# Altium PCB SENSOR_SAW.PcbDoc
Units mil, origin at the board's own origin, x right, y up, seen from the top; angles counter-clockwise.
Board outline 1000 x 1125 mil, 2 copper layers (Top Layer, Bottom Layer); 24 components, 15 nets, 79 pads, 94 vias.
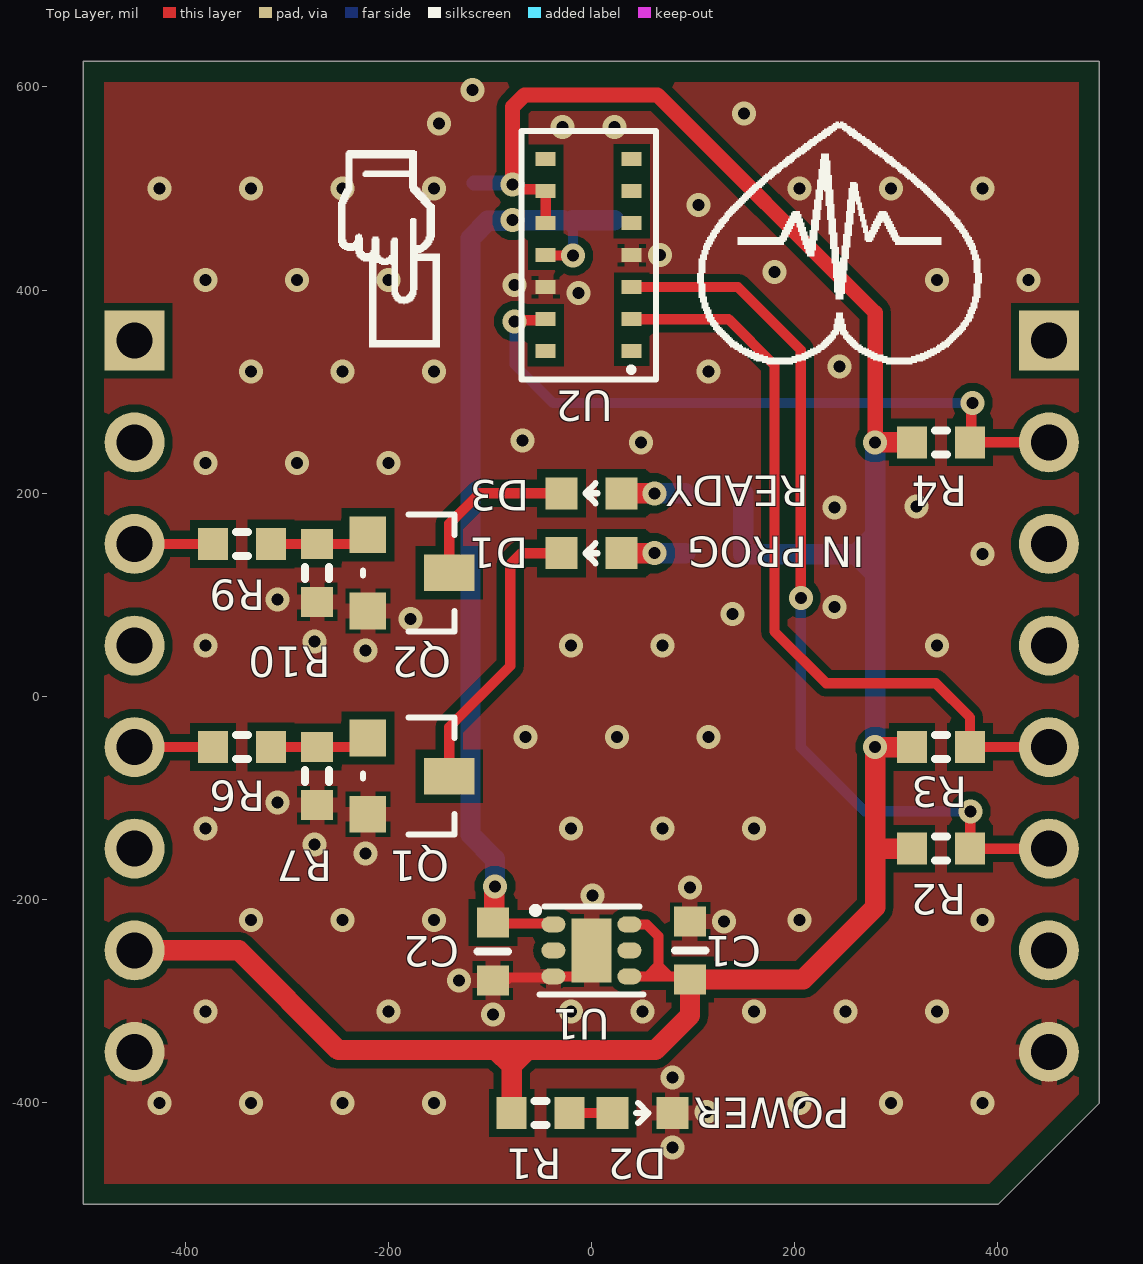
[diagram p0: Top Layer view]
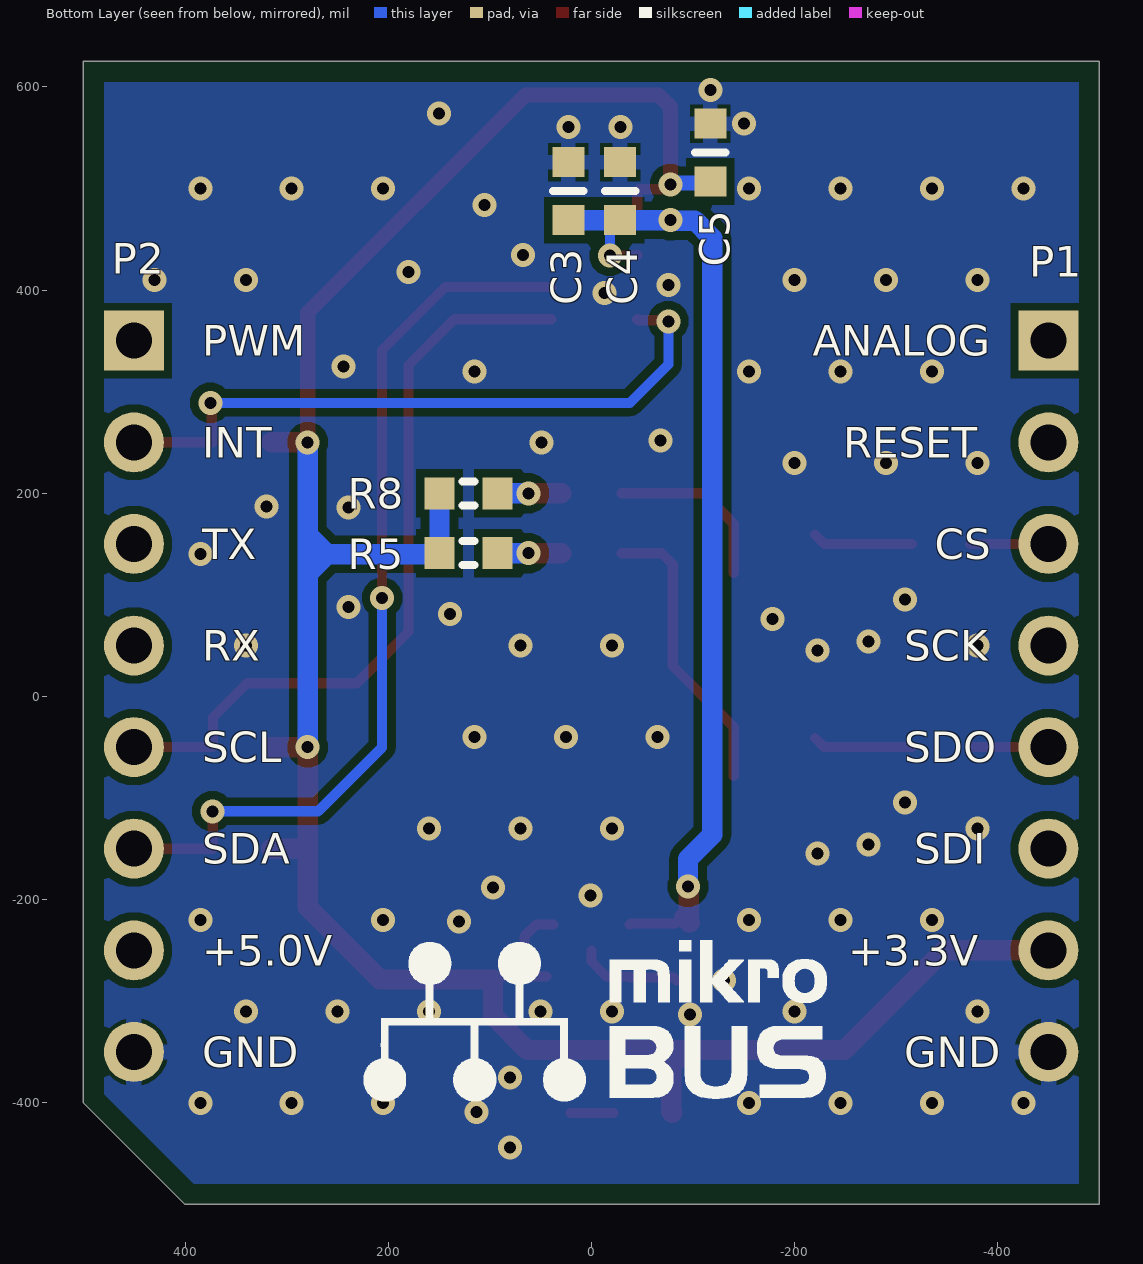
[diagram p1: Bottom Layer view, seen from below]
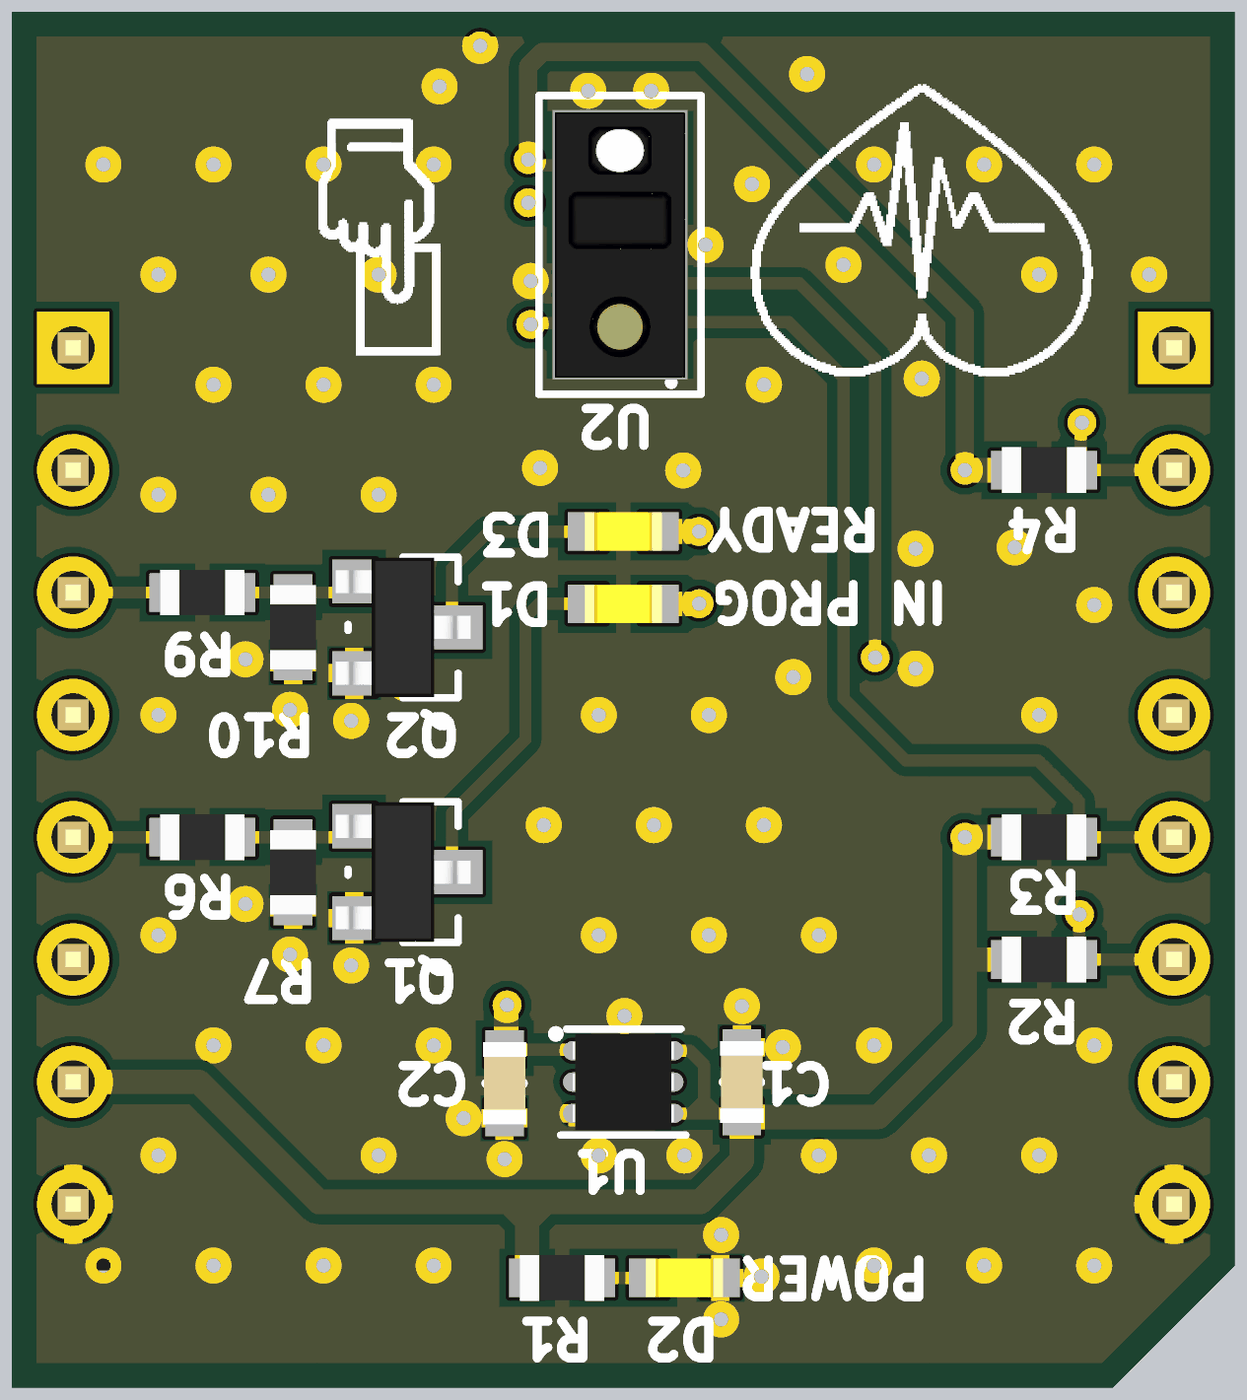
[diagram p2: 3D render of the assembled board from above, using the file's embedded part models]
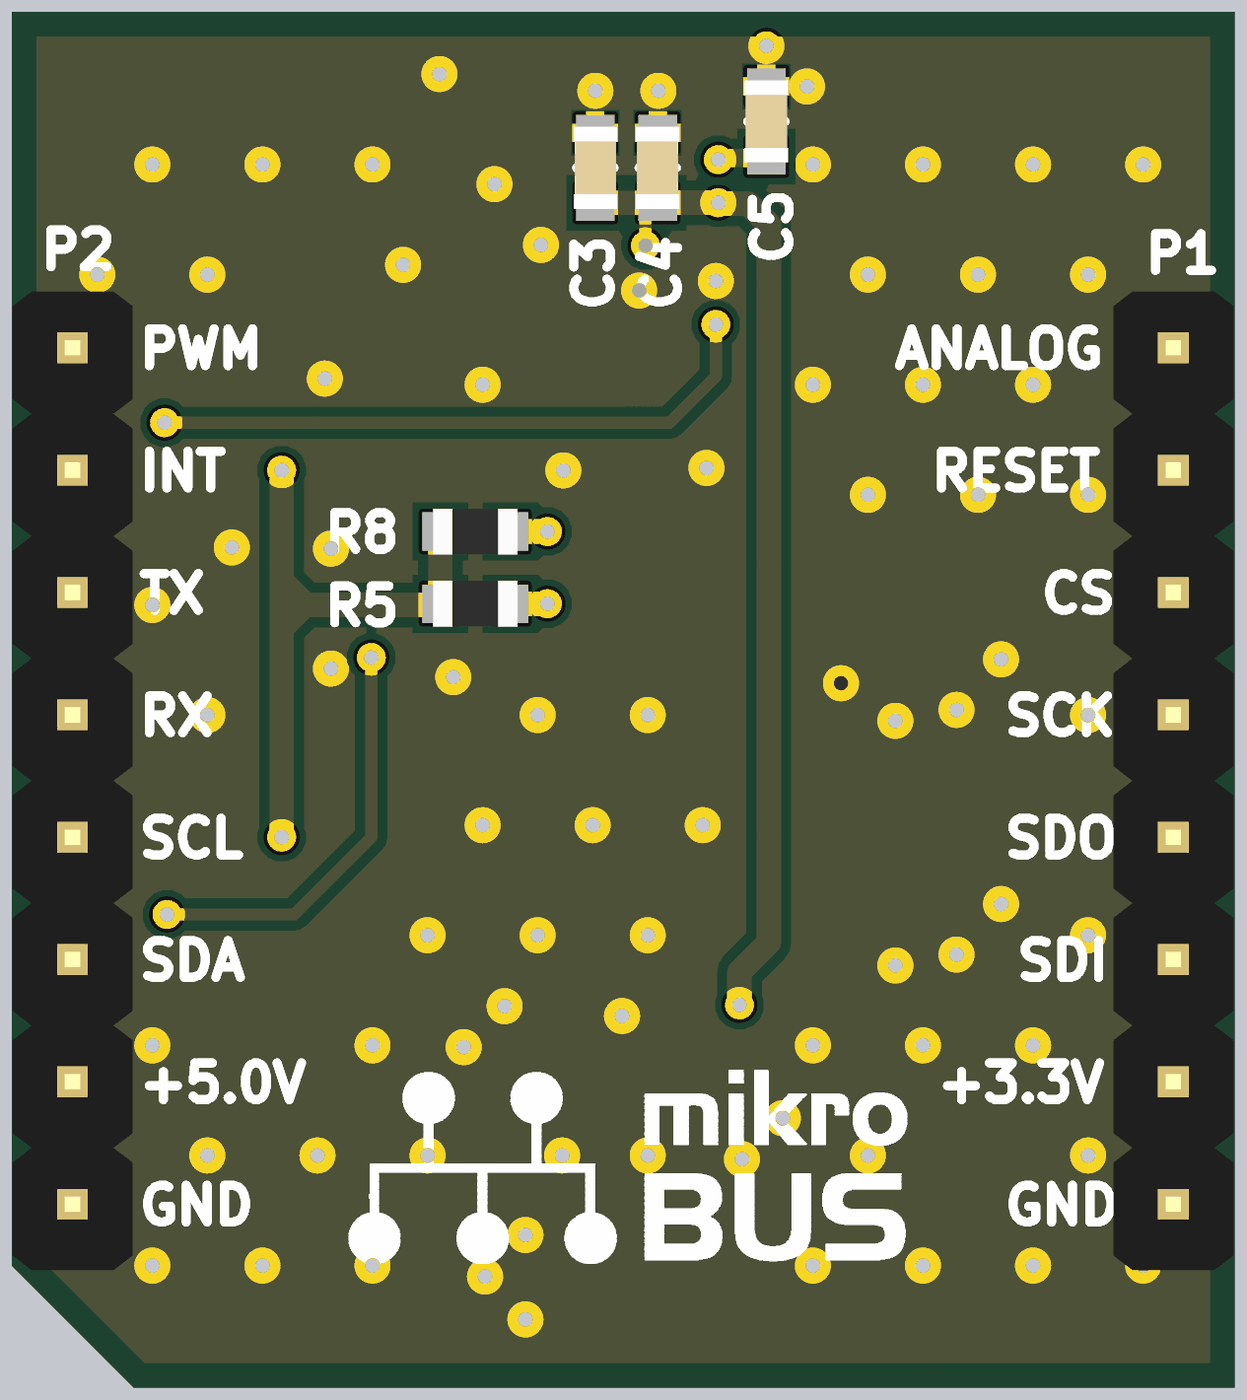
[diagram p3: 3D render of the assembled board from below, using the file's embedded part models]

## Layer stack, top to bottom
Top Solder: solder mask 0.4, Solder Resist, Dk 3.5
Top Layer: signal copper 1.4
Dielectric 1: dielectric 12.6, FR-4, Dk 4.8
Bottom Layer: signal copper 1.4
Bottom Solder: solder mask 0.4, Solder Resist, Dk 3.5

## Board outline
-500,-500 -500,625 500,625 500,-400 400,-500

## Design rules (kind name [scope] priority, off if disabled: settings)
BoardOutlineClearance [All] p1: gap=7.87 ignorepadtopadclearanceinfootprint=FALSE except(20: Poly-OutlineEdge)
Clearance [All] p1: gap=5 ignorepadtopadclearanceinfootprint=FALSE except(7.87: Track-SMDPad; 8: Arc-Poly Track-Poly SMDPad-Poly THPad-Poly Via-Poly Fill-Poly Poly-Poly Poly-Region Poly-Text Poly-Hole; 10: Track-Hole Via-Via; 12.99: Track-THPad; 21.26: THPad-THPad)
ComponentClearance [All] p1: gap=4 collisioncheckmode=3 verticalgap=4 showdistances=TRUE
DiffPairsRouting [All] p1: maxlimit=4 minlimit=4 mostfreqgap=4 toplayer_minwidth=4 toplayer_maxwidth=71497.94 toplayer_prefwidth=4 bottomlayer_minwidth=4 bottomlayer_maxwidth=71497.94 bottomlayer_prefwidth=4 maxuncoupledlength=500
Height [All] p1: minheight=0 maxheight=71497.94 prefheight=500
HoleSize [All] p1: absolutevalues=TRUE maxlimit=248.03 minlimit=7.87 maxpercent=80.000 minpercent=20.000
HoleToHoleClearance [All] p1: gap=10 allowstackedmicrovias=FALSE
MinimumAnnularRing [All] p1: minimumring=5.12
MinimumSolderMaskSliver [All] p1: minsoldermaskwidth=0
PlaneClearance [All] p1: clearance=6
PlaneConnect [All] p1: pad.planeconnectstyle=Relief pad.reliefexpansion=11.81 pad.reliefentries=4 pad.reliefconductorwidth=15 pad.reliefairgap=4 via.planeconnectstyle=Direct via.reliefexpansion=11.81 via.reliefentries=4 via.reliefconductorwidth=5 via.reliefairgap=5
PolygonConnect [All] p1: thpad.connectstyle=Relief thpad.reliefconductorwidth=15 thpad.reliefentries=4 thpad.polygonreliefangle="90 Angle" thpad.airgapwidth=4 smdpad.connectstyle=Relief smdpad.reliefconductorwidth=15 smdpad.reliefentries=4 smdpad.polygonreliefangle="90 Angle" smdpad.airgapwidth=4 via.connectstyle=Direct via.reliefconductorwidth=5 via.reliefentries=4 via.polygonreliefangle="90 Angle" via.airgapwidth=5
RoutingVias [All] p1: holewidth=7.87 width=17.72 viastyle="Through Hole" minholewidth=7.87 minwidth=17.72 maxholewidth=248.03 maxwidth=257.87
SilkToSilkClearance [All] p1: silktosilkclearance=1
SilkToSolderMaskClearance [IsPad] p1: minsilkscreentomaskgap=2 clearancetoexposedcopper=TRUE
SolderMaskExpansion SolderMaskExpansion_VIA [IsVia] p1: expansion=-20 istentingtop=FALSE
SolderMaskExpansion [All] p2: expansion=2.95 istentingtop=FALSE
UnRoutedNet [All] p1: checkbadconnections=TRUE
Width [All] p1: maxlimit=200 minlimit=5 preferedwidth=6
19 further rules are at their usual default settings.

## Components (designator, comment, footprint, x,y, rotation, side; value= is the part's Value field where it differs from the comment)
C1 "Ceramic X5R" C_0603_1608 97,-250 r90 top value=4.7uF
C2 "Ceramic X5R" C_0603_1608 -97,-251 r270 top value=4.7uF
C3 "Ceramic X5R" C_0603_1608 22.82,497.28 r90 bottom value=1uF
C4 "Ceramic X7R" C_0603_1608 -28.18,497.28 r90 bottom value=100nF
C5 "Ceramic X5R" C_0603_1608 -117,535.28 r90 bottom value=4.7uF
D1 "Blue LED 0603" OL_0603_1608 0,141 r0 top value=LTST-C193TBKT-5A
D2 "Red LED 0603" OL_0603_1608 50,-410 r180 top value=LTST-C193KRKT-5A
D3 "Green LED 0603" OL_0603_1608 0,200 r0 top value=150060VS55040
P1 "Goldpin" P_HEADER_1x8_2.54 -449.73,0.16 r270 bottom value=DS1021-1*8SF1-1
P2 "Goldpin" P_HEADER_1x8_2.54 450.27,0.16 r270 bottom value=DS1021-1*8SF1-1
Q1 "BSH103" SOT23_TO236_SC59 -180,-78.39 r270 top value=BSH103.215
Q2 "BSH103" SOT23_TO236_SC59 -180,121.61 r270 top value=BSH103.215
R1 "Resistor" R_0603_1608 -50,-410 r0 top value=1k
R2 "Resistor" R_0603_1608 344,-149.84 r180 top value=10k
R3 "Resistor" R_0603_1608 344,-49.84 r180 top value=10k
R4 "Resistor" R_0603_1608 344,250.16 r180 top value=10k
R5 "Resistor" R_0603_1608 121,141 r0 bottom value=1k
R6 "Resistor" R_0603_1608 -344,-49.84 r0 top value=1k
R7 "Resistor" R_0603_1608 -270,-78.39 r90 top value=10k
R8 "Resistor" R_0603_1608 121,200 r0 bottom value=1k
R9 "Resistor" R_0603_1608 -344,150.16 r0 top value=1k
R10 "Resistor" R_0603_1608 -270,121.61 r90 top value=10k
U1 "ADM7160ACPZN1.8-R2" LFCSP-6-3 0,-250 r0 top value=ADM7160ACPZN1.8-R7
U2 "MAX30100" MAX30100 -2.68,434.27 r180 top

## Footprints (in the part's own frame and the unit in brackets; to place one, negate y for a bottom-side part, rotate by r counter-clockwise, add the part's x,y. Pads: shape width x height; smd on the part's side, far side on the other; paste and mask are expansions set on the pad)
C_0603_1608 [mm]
  rect 0.75x0.8 smd: 1(-0.725,0) 2(0.725,0)
  silkscreen extent 0,-0.38 0,0.38, body extent -0.85,-0.45 0.85,0.45, height 0.89
LFCSP-6-3 [mm] "LGA, 12-Leads, Body 2,00x2,00mm, Pitch 0,50mm, IPC High Density"
  rrect100% 0.6x0.4 smd: 1(-0.95,0.65) 2(-0.95,0) 3(-0.95,-0.65) 4(0.95,-0.65) 5(0.95,0) 6(0.95,0.65)
  rect 1x1.6 smd: EP1(0,0)
  silkscreen extent -1.44,-1.1 1.3,1.1, body extent -1.05,-1 1.05,1, height 0.65
MAX30100 [mm]
  rect 0.5x0.35 smd: 1(-1.075,2.4) 2(-1.075,1.6) 3(-1.075,0.8) 4(-1.075,0) 5(-1.075,-0.8) 6(-1.075,-1.6) 7(-1.075,-2.4) 8(1.075,-2.4) 9(1.075,-1.6) 10(1.075,-0.8) 11(1.075,0) 12(1.075,0.8) 13(1.075,1.6) 14(1.075,2.4)
  silkscreen extent -1.69,-3.1 1.68,3.1, body extent -1.4,-2.8 1.4,2.8, height 1.29
OL_0603_1608 [mm]
  rect 0.8x0.8 smd: 1(-0.75,0) 2(0.75,0)
  silkscreen extent -0.15,-0.25 0.15,0.25, body extent -0.8,-0.4 0.8,0.4, height 0.75
P_HEADER_1x8_2.54 [mm] "Connector; Header; 8 Position; Male"
  rect 1.5x1.5 hole 0.9: 1(-8.89,0)
  round 1.5 hole 0.9: 2(-6.35,0) 3(-3.81,0) 4(-1.27,0) 5(1.27,0) 6(3.81,0) 7(6.35,0) 8(8.89,0)
  body extent -10.06,-1.25 10.26,1.25, height 8.2
R_0603_1608 [mm]
  rect 0.75x0.8 smd: 1(-0.725,0) 2(0.725,0)
  silkscreen extent -0.15,-0.3 0.15,0.3, body extent -0.87,-0.47 0.88,0.48, height 0.54
SOT23_TO236_SC59 [mil]
  rect 36x36 smd: 1(-37.5,-40) 2(37.5,-40)
  rect 36x50 smd: 3(0,40)
  silkscreen extent -57,-45 58,45, body extent -57,-55 57,55, height 51

## Part data
C1 C2 C5: library part C_4.7uF_16V_X5R_0603_10, "Capacitor", dielectric=X5R, Manufacturer=Murata, Manufacturer Part Number=GRM188R61C475KAAJD, Tolerance (%)=10, voltage=16V, HelpURL=https://datasheet.octopart.com/GRM188R61C475KAAJD-Murata-datasheet-66077093.pdf, Part Number=C_4.7uF_16V_X5R_0603_10, SCH_Footprint=0603, Supplier 1=TME, Supplier 2="RS Components", Supplier 3=Farnell, Supplier 4=Mouser, Supplier 5=Digi-Key, Supplier 6=LCSC, Supplier Part Number 2=884-7264P, Supplier Part Number 3=2611924, Supplier Part Number 4=81-GRM188R61C475KAJD, Supplier Part Number 5=490-10481-2-ND
C3: library part C_1uF_10V_X5R_0603_10, "Capacitor", dielectric=X5R, Manufacturer=Murata, Manufacturer Part Number=GRM188R61A105KA61J, Tolerance (%)=10, voltage=10V, HelpURL=https://datasheet.octopart.com/GRM188R61A105KA61J-Murata-datasheet-66077091.pdf, Part Number=C_1uF_10V_X5R_0603_10, SCH_Footprint=0603, Supplier 1=TME, Supplier 2="RS Components", Supplier 3=Farnell, Supplier 4=Mouser, Supplier 5=Digi-Key, Supplier 6=LCSC, Supplier Part Number 4=81-GRM18R61A105KA61J, Supplier Part Number 5=490-6408-1-ND
C4: library part C_100nF_16V_X7R_0603_10, "Capacitor", dielectric=X7R, Manufacturer=Kemet, Manufacturer Part Number=C0603C104K4RAC7013, Tolerance (%)=10, voltage=16V, HelpURL=https://pl.mouser.com/datasheet/2/212/KEM_C1002_X7R_SMD-1102033.pdf, Part Number=C_100nF_16V_X7R_0603_10, SCH_Footprint=0603, Supplier 1=TME, Supplier 2="RS Components", Supplier 3=Farnell, Supplier 4=Mouser, Supplier 5=Digi-Key, Supplier 6=LCSC, Supplier Part Number 4=80-C0603C104K4RC7013, Supplier Part Number 5=399-7372-2-ND
D1: library part OL_B_0603_LTST-C193TBKT-5A, "LED_BLUE", Manufacturer=Lite-On, Manufacturer Part Number=LTST-C193TBKT-5A, HelpURL=https://pl.mouser.com/datasheet/2/239/Lite-On-LTST-C193TBKT-5A-1175300.pdf, Part Number=OL_B_0603_LTST-C193TBKT-5A, SCH_Footprint=0603, Supplier 1=TME, Supplier 2="RS Components", Supplier 3=Farnell, Supplier 4=Mouser, Supplier 5=Digi-Key, Supplier 6=LCSC, Supplier Part Number 1=LTST-C193TBKT-5A, Supplier Part Number 2=6921051, Supplier Part Number 4=859-LTSTC193TBKT5A, Supplier Part Number 5=160-1827-1-ND
D2: library part OL_R_0603_LTST-C193KRKT-5A, "LED_RED", Manufacturer=Lite-On, Manufacturer Part Number=LTST-C193KRKT-5A, HelpURL=https://pl.mouser.com/datasheet/2/239/LTST-C193KRKT-5A-1141706.pdf, Part Number=OL_R_0603_LTST-C193KRKT-5A, SCH_Footprint=0603, Supplier 1=TME, Supplier 2="RS Components", Supplier 3=Farnell, Supplier 4=Mouser, Supplier 5=Digi-Key, Supplier 6=LCSC, Supplier Part Number 1=LTST-C193KRKT-5A, Supplier Part Number 2=6921041, Supplier Part Number 4=859-LTSTC193KRKT5A, Supplier Part Number 5=160-1830-1-ND
D3: library part OL_G_0603_150060VS55040, "LED GREEN", Manufacturer=Wurth, Manufacturer Part Number=150060VS55040, Supplier Part Number 1=OSG80603C1E, HelpURL=https://datasheet.octopart.com/150060VS55040-W%C3%BCrth-Elektronik-datasheet-140170128.pdf, Part Number=OL_G_0603_150060VS55040, SCH_Footprint=0603, Supplier 1=TME, Supplier 2="RS Components", Supplier 3=Farnell, Supplier 4=Mouser, Supplier 5=Digi-Key, Supplier 6=LCSC, Supplier Part Number 2=1766157, Supplier Part Number 3=2900765, Supplier Part Number 4=710-150060VS55040, Supplier Part Number 5=732-12017-1-ND
P1 P2: library part P_HEADER_1x8_2.54, "Pin Header", Manufacturer=Connfly, Manufacturer Part Number=DS1021-1*8SF1-1, Supplier Part Number 1=ZL201-08G, HelpURL=http://www.tme.eu/en/Document/cc301e58a5da78cb543a94b5a5b7f06a/DS1021.pdf, Part Number=P_HEADER_1x8_2.54, SCH_Footprint="1x8 2.54mm", Supplier 1=TME, Supplier 2="RS Components", Supplier 3=Farnell, Supplier 4=Mouser, Supplier 5=Digi-Key, Supplier 6=LCSC
Q1 Q2: library part QN_BSH103, Current=0A85, Manufacturer=Nexperia, Manufacturer Part Number=BSH103.215, voltage=30V, HelpURL=http://datasheet.octopart.com/BSH103.215-Philips-datasheet-125753.pdf, Part Number=QN_BSH103, SCH_Footprint=SOT23, Supplier 1=TME, Supplier 2="RS Components", Supplier 3=Farnell, Supplier 4=Mouser, Supplier 5=Digi-Key, Supplier 6=LCSC, Supplier Part Number 1=BSH103.215, Supplier Part Number 3=2336818, Supplier Part Number 4=771-BSH103-T/R, Supplier Part Number 5=1727-4319-1-ND, Type=N-MOS
R1 R5 R6 R8 R9: library part R_1k_0603_1, Manufacturer=Vishay, Manufacturer Part Number=CRCW06031K00FKEA, Power=100mW, Tolerance=1%, voltage=75V, HelpURL=http://www.farnell.com/datasheets/2310790.pdf?_ga=2.256888843.1690599162.1548417389-1379097396.1542296996&_gac=1.262631934.1547230258.Cj0KCQiAmuHhBRD0ARIsAFWyPwhX8HcvXnM3tA0ZBodZLzDIjH2ZxLpjT5LWo9bad_HPRbU8LfPq44UaAhEwEALw_wcB, Part Number=R_1k_0603_1, SCH_Footprint=0603, Supplier 1=TME, Supplier 2="RS Components", Supplier 3=Farnell, Supplier 4=Mouser, Supplier 5=Digi-Key, Supplier 6=LCSC, Supplier Part Number 2=678-9875P, Supplier Part Number 3=1469740, Supplier Part Number 4=71-CRCW0603-1.0K-E3, Supplier Part Number 5=541-1.00KHCT-ND
R2 R3 R4 R7 R10: library part R_10k_0603_1, Manufacturer=Vishay, Manufacturer Part Number=CRCW060310K0FKTABC, Power=100mW, Tolerance=1%, voltage=75V, HelpURL=http://www.tme.eu/pl/Document/622e28308c06d160637f2b14751ba16b/Data%20Sheet%20CRCW_BCe3.pdf, Part Number=R_10k_0603_1, SCH_Footprint=0603, Supplier 1=TME, Supplier 2="RS Components", Supplier 3=Farnell, Supplier 4=Mouser, Supplier 5=Digi-Key, Supplier 6=LCSC, Supplier Part Number 1=CRCW060310K0FKTABC, Supplier Part Number 4=667-ERJ-3EKF1002V, Supplier Part Number 5=P10KGCT-ND
U1: library part VL_ADM7160ACPZN1.8-R7, Current=200mA, Manufacturer="Analog Devices", Manufacturer Part Number=ADM7160ACPZN1.8-R7, voltage=1.8V, HelpURL=http://datasheet.octopart.com/ADM7160ACPZN1.8-R2-Analog-Devices-datasheet-26822004.pdf, Part Number=VL_ADM7160ACPZN1.8-R7, SCH_Footprint=LFCSP6, Supplier 1=TME, Supplier 2="RS Components", Supplier 3=Farnell, Supplier 4=Mouser, Supplier 5=Digi-Key, Supplier 6=LCSC, Supplier Part Number 4=584-DM7160ACPZN1.8R7, Supplier Part Number 5=ADM7160ACPZN1.8-R7CT-ND
U2: library part U_MAX30100, Frequency (kHz)=0, HelpURL=https://datasheets.maximintegrated.com/en/ds/MAX30100.pdf, Imax (A)=0, Iswitch (A)=0, Part Number=U_MAX30100, SCH_Footprint=MAX30100, Supplier 1=TME, Supplier 2="RS Components", Supplier 3=Farnell, Supplier 4=Mouser, Supplier 5=Digi-Key, Supplier 6=LCSC, Vin max (V)=0, Vin min (V)=0, Vout max (V)=0, Vout min (V)=0

## Via types
v1: diameter 23.62, hole 11.81, Top Layer to Bottom Layer, 94 vias

## Nets (pads, with @x,y where several pads share a name; then routed paths per layer and width w, separated by ;. In a path a pad name is that pad's centre, name@x,y a point inside that pad or via, vN(x,y) a via of type N, cw(c..) or ccw(c..) an arc to the next point about the centre after c; other vN are vias at no path point)
+1.8V: C2.1 C3.1 C4.1 U1.1 U2.11 | length 943.9
  Top Layer w10: C2.1@-84,-222.45 -83.02,-223.43 -38.37,-223.43 U1.1 ; U2.11 -44.8,434.07 -18.34,434.07 v1(-18.14,433.86)
  Top Layer w20: C2.1 -96.02,-222.45 -91.25,-217.69 -95.69,-217.69 -95.69,-187.69 v1(-95,-187)
  Bottom Layer w10: C4.1 -27.93,468.74 -18.16,458.97 v1@-18.16,433.89
  Bottom Layer w20: v1(-95,-187) -95,-160 -119,-136 -119,451 -101.92,468.07 -78.37,468.07 v1(-77.68,468.77) ; v1(-77.68,468.77) C4.1@-28.2,468.75 ; C4.1@-18.26,468.6 C3.1@22.68,468.6
+3.3V: C1.1 C5.1 P1.7 R1.1 R2.2 R3.2 R4.2 R5.2 R8.2 U1.4 U1.6 U2.9 U2.10 | length 2669.8
  Top Layer w10: v1(-77.68,504) -74,504 -69.15,499.15 -46.89,499.15 U2.9 U2.10 ; U1.6 54.41,-224.41 66,-236 66,-265 ; U1.4@44.25,-275.76 55.13,-275.76 ; C1.1 94.22,-275.76 76.76,-275.76 ; 55.13,-275.76 66,-275.76 ; 55.13,-275.76 65.89,-265 66,-265 ; 66,-275.76 76.76,-275.76 ; 66,-275.76 66,-265 ; 66,-265 76.76,-275.76
  Top Layer w15: v1(-77.68,504) -77.68,580.32 -66,592 65,592 279.3,377.7 v1(279.3,250.16)
  Top Layer w20: P1.7 -347.16,-249.84 -249,-348 -94,-348 ; R1.1@-79.54,-410 -78.54,-409 -78.54,-363.46 ; v1(279.3,250.16) R4.2 ; R2.2 279.3,-149.84 ; R3.2 v1(279.3,-49.84) 279.3,-149.84 ; -94,-348 -63.09,-348 ; -94,-348 -78.54,-363.46 ; -78.54,-363.46 -63.09,-348 ; -63.09,-348 63,-348 97,-314 C1.1 208.46,-278.54 279.3,-207.7 279.3,-149.84
  Bottom Layer w10: C5.1 C5.1@-115.63,505.37 ; v1@-79.05,505.37 v1(-77.68,504)
  Bottom Layer w15: C5.1@-115.63,505.37 v1@-79.05,505.37
  Bottom Layer w20: R5.2@149.54,140 R5.2 ; R8.2 R5.2 ; v1(279.3,-49.84) 279.3,120.7 ; v1(279.3,250.16) 279.3,159.3 ; R5.2 150.54,140 260,140 ; 260,140 279.3,120.7 ; 260,140 279.3,140 ; 260,140 279.3,159.3 ; 279.3,120.7 279.3,130 279.3,140 ; 279.3,140 279.3,159.3
GND: C1.2 C2.2 C3.2 C4.2 C5.2 D2.1 P1.8 P2.8 Q1.2 Q2.2 R7.1 R10.1 U1.3 U1.EP1 U2.4 U2.12 | length 102.9
  Top Layer w10: C2.2@-84,-279.54 -81.15,-276.69 -38.5,-276.69 U1.3 ; U1.3@-37.2,-275.79 U1.3 ; U1.EP1 0,-260.9 -14.69,-275.59 U1.3
  other v1: 80,-444 112.99,-409 -425,-400 -335,-400 -245,-400 -155,-400 205,-400 295,-400 385,-400 80,-375 -97,-313 -380,-310 -200,-310 -20,-310 50,-310 160,-310 250,-310 340,-310 -130.46,-279.54 130.46,-221.46 -335,-220 -245,-220 -155,-220 205,-220 385,-220 1,-196 97,-188 -222.46,-154.73 -272.46,-145.78 -380,-130 -20,-130 70,-130 160,-130 -308.84,-104.48 -65,-40 25,-40 115,-40 -222.46,45.27 -380,50 -20,50 70,50 340,50 -272.46,54.23 -178,76 139,81 239,88 -308.84,95.53 385,140 239,186 320,187 -380,230 -290,230 -200,230 49,250 -68,252 -335,320 -245,320 -155,320 115,320 244,325 -13,397 -75.68,404.78 -380,410 -290,410 -200,410 340,410 430,410 180,418 67.32,434.28 105.29,483.96 -425,500 -335,500 -245,500 -155,500 205,500 295,500 385,500 -28.68,560.28 22.82,560.28 -150.18,563.82 150.29,573.96 -117,597
I\N\T\: P2.2 R4.1 U2.13 | length 659.1
  Top Layer w10: v1(-75.68,369.28) -73.27,371.69 -71.86,370.28 -46,370.28 U2.13 ; v1(375,289) 373.77,287.77 373.77,251.39 R4.1 P2.2
  Bottom Layer w10: v1(-75.68,369.28) -75.68,326.68 -38,289 v1(375,289)
IN_PROG_LED: P1.5 R6.1 | length 77.2
  Top Layer w10: P1.5 R6.1
NetD1_1: D1.1 Q1.3 | length 288.3
  Top Layer w10: Q1.3 -140,-30 -80,30 -80,130 -69,141 D1.1
NetD1_2: D1.2 R5.1 | length 62.9
  Top Layer w20: D1.2 v1(62,141)
  Bottom Layer w20: v1(62,141) R5.1
NetD2_2: D2.2 R1.2 | length 41.9
  Top Layer w10: R1.2 D2.2
NetD3_1: D3.1 Q2.3 | length 171.3
  Top Layer w10: Q2.3 -140,170 -110,200 D3.1
NetD3_2: D3.2 R8.1 | length 62.9
  Top Layer w20: D3.2 v1(62,200)
  Bottom Layer w20: v1(62,200) R8.1
NetQ1_1: Q1.1 R6.2 R7.2 | length 99.2
  Top Layer w10: R6.2 R7.2 -228.96,-49.85 Q1.1
NetQ2_1: Q2.1 R9.2 R10.2 | length 99.2
  Top Layer w10: R9.2 R10.2 -228.96,150.16 Q2.1
READY_LED: P1.3 R9.1 | length 77.2
  Top Layer w10: P1.3 R9.1
SCL: P2.5 R3.1 U2.2 | length 755.9
  Top Layer w10: U2.2 134.97,371.28 180,326.26 180,64 231,13 339,13 372.54,-20.54 R3.1 P2.5
SDA: P2.6 R2.1 U2.3 | length 891
  Top Layer w10: U2.3 39.89,403.03 143.97,403.03 206,341 v1(206,97) ; v1(373,-113) 372.77,-113.23 372.77,-149.61 R2.1 P2.6
  Bottom Layer w10: v1(206,97) 206,-50 269,-113 v1(373,-113)
pads on no net: P1.1 P1.2 P1.4 P1.6 P2.1 P2.3 P2.4 P2.7 U1.2 U1.5 U2.1 U2.5 U2.6 U2.7 U2.8 U2.14

## Polygon pours and split planes (outlines as drawn)
GND on Bottom Layer "NONET_L02_P-001" (solid, pour order 0): -500,625 500,625 500,-400 400,-500 -500,-500
GND on Top Layer "NONET_L02_P-001" (solid, pour order 1): -500,625 500,625 500,-400 400,-500 -500,-500

## Silkscreen, mask and mechanical layers (free items; w line width, h text height)
Top Overlay:
  drawing of 5 lines, arcs and shapes, not listed
  text "READY" at 214,217 h30 r180
  text "IN PROG" at 268.98,157 h30 r180
  text "POWER" at 254,-395 h30 r180
Bottom Overlay:
  drawing of 2425 lines, arcs and shapes, not listed
  text "ANALOG" at -217.73,335.16 h30
  text "PWM" at 383.23,335.16 h30
  text "RESET" at -247.72,235.16 h30
  text "INT" at 383.23,235.16 h30
  text "CS" at -337.69,135.16 h30
  text "TX" at 383.23,135.16 h30
  text "SCK" at -307.7,35.16 h30
  text "RX" at 383.23,35.16 h30
  text "SDO" at -307.7,-64.84 h30
  text "SCL" at 383.23,-64.84 h30
  text "SDI" at -317.7,-164.84 h30
  text "SDA" at 383.23,-164.84 h30
  text "+3.3V" at -252.72,-264.84 h30
  text "+5.0V" at 383.23,-264.84 h30
  text "GND" at -307.7,-364.84 h30
  text "GND" at 383.23,-364.84 h30
Mechanical 1:
  the board outline again, w10